# Altium PCB 主板-双BH(1).PcbDoc (part 2 of 13)
Units mm, origin at the board's own origin, x right, y up, seen from the top; angles counter-clockwise.
Board outline 97.69 x 103.45 mm, 2 copper layers (Top Layer, Bottom Layer); 78 components, 75 nets, 243 pads, 279 vias.
Unrouted connection lines stored in the file: 7.
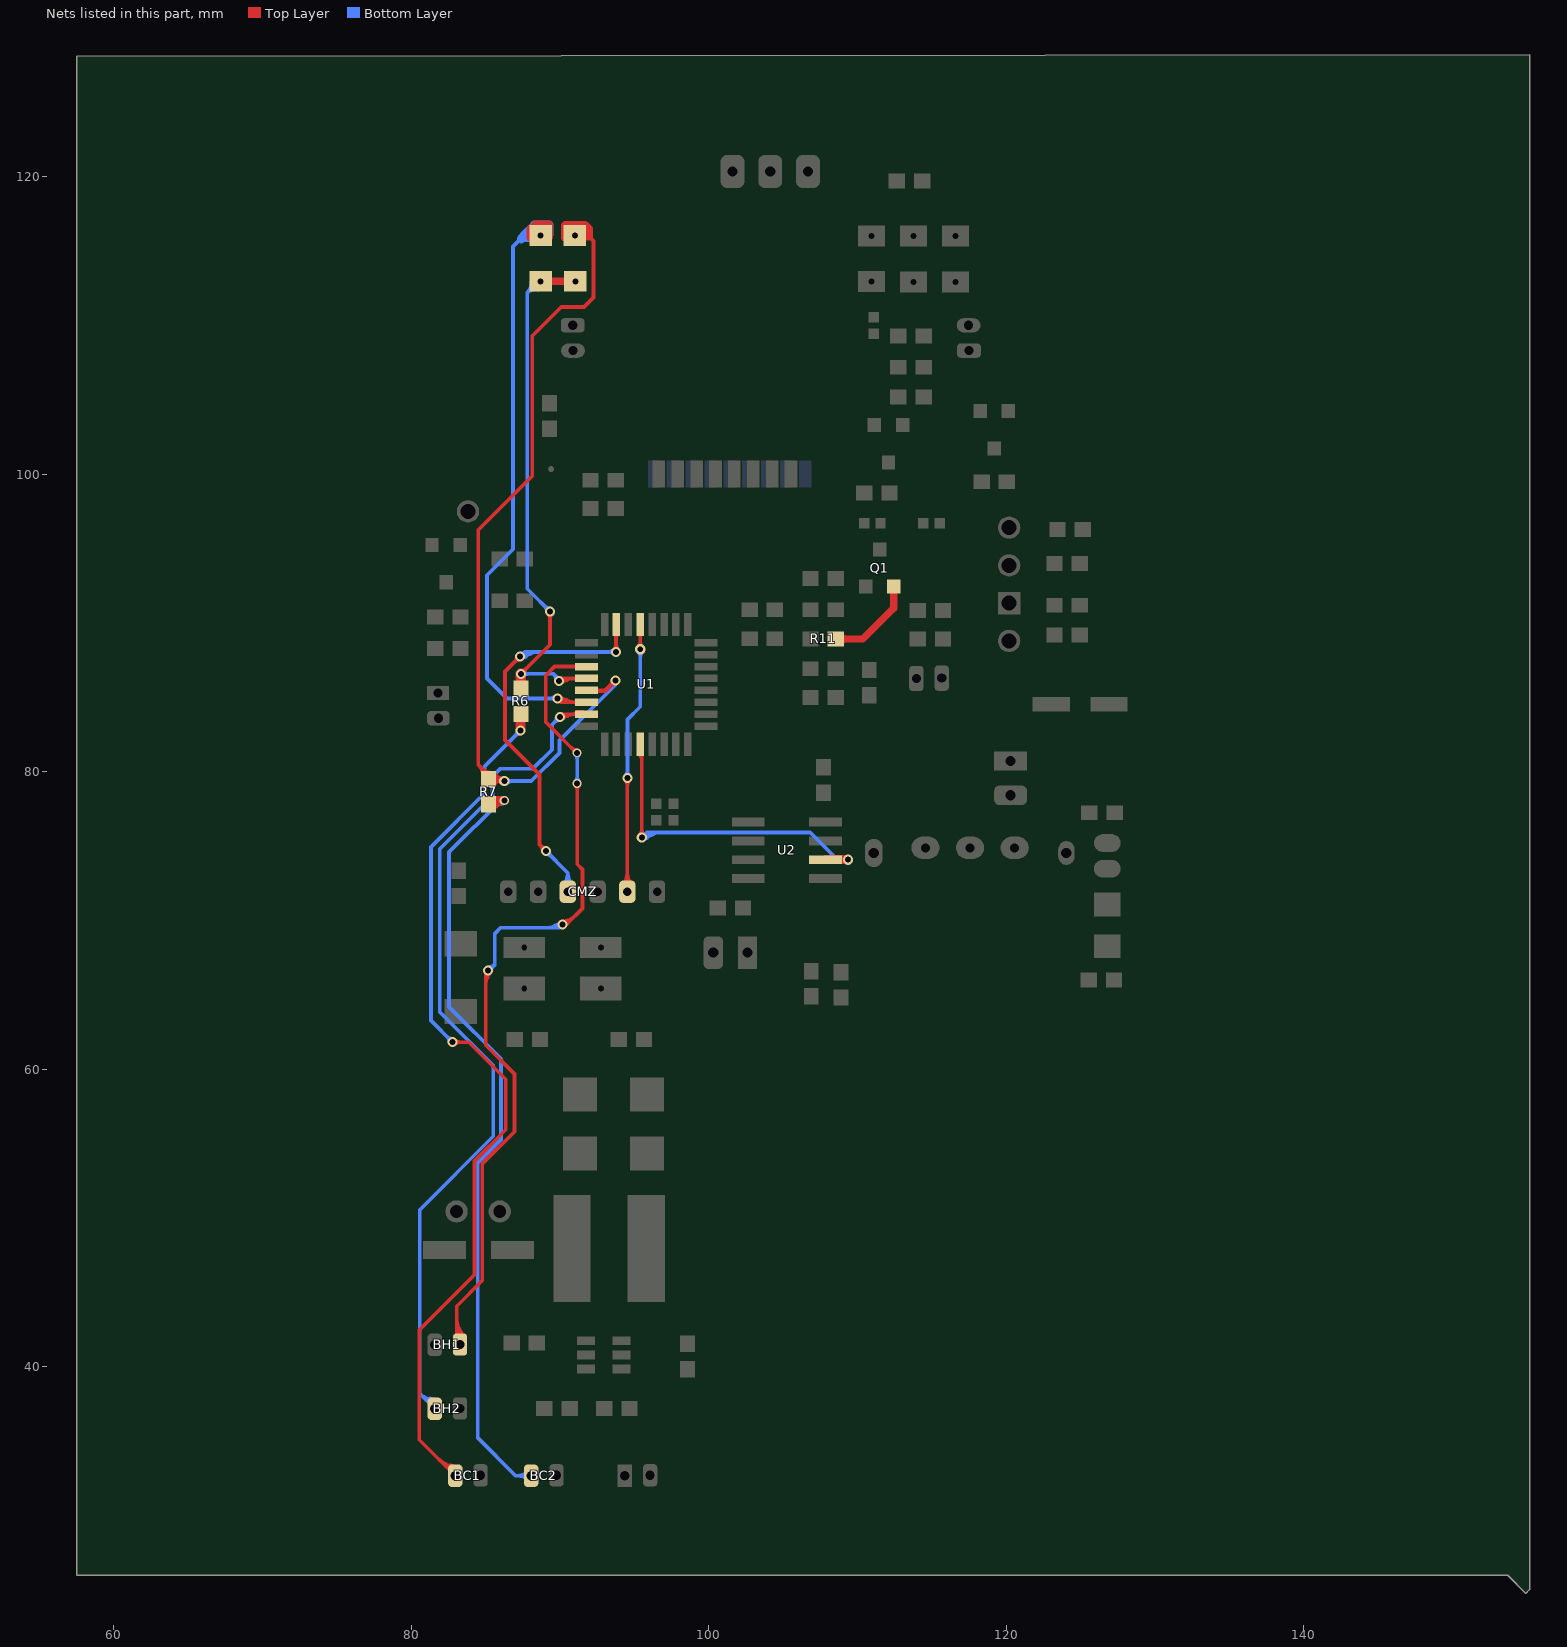
[diagram p2: the nets of this part, all layers, seen from the top]

## Via types
v1: diameter 0.7, hole 0.4, Top Layer to Bottom Layer, 108 vias
v2: diameter 0.68, hole 0.4, Top Layer to Bottom Layer, 87 vias
v3: diameter 0.8, hole 0.5, Top Layer to Bottom Layer, tented both sides, 33 vias
v4: diameter 0.6, hole 0.4, Top Layer to Bottom Layer, 12 vias
v5: diameter 0.9, hole 0.5, Top Layer to Bottom Layer, 8 vias
v6: diameter 0.8, hole 0.5, Top Layer to Bottom Layer, 6 vias
v7: diameter 1, hole 0.75, Top Layer to Bottom Layer, tented both sides, 5 vias
v8: diameter 3.4, hole 2.9, Top Layer to Bottom Layer, 4 vias
v9: diameter 1, hole 0.6, Top Layer to Bottom Layer, tented both sides, 3 vias
v10: diameter 1, hole 0.56, Top Layer to Bottom Layer, tented both sides, 2 vias
v11: diameter 1.1, hole 0.68, Top Layer to Bottom Layer, 2 vias
v12: diameter 0.8, hole 0.4, Top Layer to Bottom Layer, 2 vias
v13: diameter 0.65, hole 0.4, Top Layer to Bottom Layer, tented both sides, 2 vias
v14: diameter 1, hole 0.6, Top Layer to Bottom Layer, tented bottom, 1 vias
v15: diameter 0.7, hole 0.4, Top Layer to Bottom Layer, tented bottom, 1 vias
v16: diameter 0.95, hole 0.5, Top Layer to Bottom Layer, 1 vias
v17: diameter 0.64, hole 0.4, Top Layer to Bottom Layer, 1 vias
v18: diameter 0.62, hole 0.4, Top Layer to Bottom Layer, 1 vias

## Nets (pads, with @x,y where several pads share a name; then routed paths per layer and width w, separated by ;. In a path a pad name is that pad's centre, name@x,y a point inside that pad or via, vN(x,y) a via of type N, cw(c..) or ccw(c..) an arc to the next point about the centre after c; other vN are vias at no path point) (continued)
38BC1: BC1.2 pad.0@88.7,112.98 pad.0@91.032,112.98 R6.1 R6.2 U1.20 | length 138.1
  Top Layer w0.254: BC1.2@82.613,32.984 ccw(c82.112,33.04) 82.503,33.359 ccw(c82.727,33.541) BC1.2@82.834,33.272 ; v2(82.779,61.824) 83.871,61.824 86.36,59.334 86.36,55.939 84.261,53.84 84.261,46.186 80.543,42.469 80.543,35.095 BC1.2@82.964,32.674 ; R6.2@87.351,83.605 R6.2@87.63,83.884 ; R6.1@87.376,85.658 R6.1@87.45,85.584 ; v2(87.376,86.589) 89.332,88.544 v2(89.332,90.78) ; v2(89.941,86.106) 90.113,86.278 U1.20@91.775,86.278 ; 81.9,33.738 ccw(c82.964,34.801) BC1.2@82.964,33.297 ; 81.9,33.738 ccw(c82.964,34.801) BC1.2@82.964,33.297 ; 81.9,33.738 ccw(c82.964,34.801) BC1.2@82.964,33.297 ; 82.158,33.513 cw(c81.874,32.455) BC1.2@82.874,32.904 ; 82.158,33.513 cw(c81.874,32.455) BC1.2@82.874,32.904 ; 82.158,33.513 cw(c81.874,32.455) BC1.2@82.874,32.904 ; 82.334,33.304 ccw(c82.964,33.934) BC1.2@82.964,33.043 ; 82.334,33.304 ccw(c82.964,33.934) BC1.2@82.964,33.043 ; 82.334,33.304 ccw(c82.964,33.934) BC1.2@82.964,33.043 ; BC1.2@82.674,33.375 cw(c82.503,32.738) BC1.2@83.105,33.008 ; BC1.2@82.674,33.375 cw(c82.503,32.738) BC1.2@83.105,33.008 ; BC1.2@82.674,33.375 cw(c82.503,32.738) BC1.2@83.105,33.008 ; v2@82.929,61.673 cw(c83.293,61.309) 83.293,61.824 ; v2@82.929,61.673 cw(c83.293,61.309) 83.293,61.824 ; v2@82.929,61.673 cw(c83.293,61.309) 83.293,61.824 ; v2@82.929,61.974 ccw(c83.293,62.338) 83.293,61.824 ; v2@82.929,61.974 ccw(c83.293,62.338) 83.293,61.824 ; v2@82.929,61.974 ccw(c83.293,62.338) 83.293,61.824 ; v2@87.376,86.802 ccw(c87.376,87.316) 87.74,86.952 ; v2@87.376,86.802 ccw(c87.376,87.316) 87.74,86.952 ; v2@87.376,86.802 ccw(c87.376,87.316) 87.74,86.952 ; v2@87.589,86.589 cw(c88.103,86.589) 87.74,86.952 ; v2@87.589,86.589 cw(c88.103,86.589) 87.74,86.952 ; v2@87.589,86.589 cw(c88.103,86.589) 87.74,86.952 ; v2@89.181,90.629 cw(c88.818,90.265) 89.332,90.265 ; v2@89.181,90.629 cw(c88.818,90.265) 89.332,90.265 ; v2@89.181,90.629 cw(c88.818,90.265) 89.332,90.265 ; 89.332,90.265 cw(c89.846,90.265) v2@89.482,90.629 ; 89.332,90.265 cw(c89.846,90.265) v2@89.482,90.629 ; 89.332,90.265 cw(c89.846,90.265) v2@89.482,90.629 ; v2@89.912,86.135 cw(c90.256,85.791) 90.256,86.278 ; v2@89.912,86.135 cw(c90.256,85.791) 90.256,86.278 ; v2@89.912,86.135 cw(c90.256,85.791) 90.256,86.278 ; v2@90.092,85.955 cw(c90.87,85.178) 90.87,86.278 ; v2@90.092,85.955 cw(c90.87,85.178) 90.87,86.278 ; v2@90.092,85.955 cw(c90.87,85.178) 90.87,86.278 ; v2@90.103,86.245 ccw(c90.331,86.442) 90.482,86.181 ; v2@90.103,86.245 ccw(c90.331,86.442) 90.482,86.181 ; v2@90.103,86.245 ccw(c90.331,86.442) 90.482,86.181 ; 90.953,86.278 ccw(c90.953,86.574) U1.20@91.163,86.364 ; 90.953,86.278 cw(c90.953,85.981) U1.20@91.163,86.191 ; 90.953,86.278 ccw(c90.953,86.574) U1.20@91.163,86.364 ; 90.953,86.278 cw(c90.953,85.981) U1.20@91.163,86.191 ; 90.953,86.278 ccw(c90.953,86.574) U1.20@91.163,86.364 ; 90.953,86.278 cw(c90.953,85.981) U1.20@91.163,86.191
  Top Layer w0.5: pad.0@88.7,112.98 pad.0@91.032,112.98
  Top Layer w0.7: v2(87.351,82.779) 87.351,83.605 87.351,83.785 R6.2@87.45,83.884 ; R6.1@87.376,85.658 v2(87.376,86.589)
  Bottom Layer w0.254: v2(82.779,61.824) 81.331,63.271 81.331,74.955 84.938,78.562 84.938,80.366 v2(87.351,82.779) ; v2(87.376,86.589) 89.56,86.589 ; pad.0@88.57,112.98 87.808,112.218 ; v2@89.497,90.614 87.808,92.304 87.808,112.218 ; v2@90.043,86.106 89.56,86.589 ; 82.415,62.187 ccw(c82.779,62.551) v2@82.779,62.037 ; 82.415,62.187 cw(c82.051,61.824) v2@82.566,61.824 ; 82.415,62.187 ccw(c82.779,62.551) v2@82.779,62.037 ; 82.415,62.187 cw(c82.051,61.824) v2@82.566,61.824 ; 82.415,62.187 ccw(c82.779,62.551) v2@82.779,62.037 ; 82.415,62.187 cw(c82.051,61.824) v2@82.566,61.824 ; 86.987,82.415 ccw(c86.623,82.779) v2@87.138,82.779 ; 86.987,82.415 cw(c87.351,82.051) v2@87.351,82.566 ; 86.987,82.415 ccw(c86.623,82.779) v2@87.138,82.779 ; 86.987,82.415 cw(c87.351,82.051) v2@87.351,82.566 ; 86.987,82.415 ccw(c86.623,82.779) v2@87.138,82.779 ; 86.987,82.415 cw(c87.351,82.051) v2@87.351,82.566 ; v2@87.527,86.438 cw(c87.89,86.074) 87.89,86.589 ; v2@87.527,86.438 cw(c87.89,86.074) 87.89,86.589 ; v2@87.527,86.438 cw(c87.89,86.074) 87.89,86.589 ; v2@87.527,86.739 ccw(c87.89,87.103) 87.89,86.589 ; v2@87.527,86.739 ccw(c87.89,87.103) 87.89,86.589 ; v2@87.527,86.739 ccw(c87.89,87.103) 87.89,86.589 ; 87.808,112.218 ccw(c87.149,112.876) pad.0@88.078,112.941 ; 87.808,112.218 cw(c88.348,111.678) pad.0@88.52,112.422 ; 87.808,112.218 ccw(c87.149,112.876) pad.0@88.078,112.941 ; 87.808,112.218 cw(c88.348,111.678) pad.0@88.52,112.422 ; 87.808,112.218 ccw(c87.149,112.876) pad.0@88.078,112.941 ; 87.808,112.218 cw(c88.348,111.678) pad.0@88.52,112.422 ; 88.968,91.143 ccw(c89.332,91.507) v2@89.332,90.993 ; 88.968,91.143 cw(c88.605,90.78) v2@89.119,90.78 ; 88.968,91.143 ccw(c89.332,91.507) v2@89.332,90.993 ; 88.968,91.143 cw(c88.605,90.78) v2@89.119,90.78 ; 88.968,91.143 ccw(c89.332,91.507) v2@89.332,90.993 ; 88.968,91.143 cw(c88.605,90.78) v2@89.119,90.78 ; 89.56,86.589 cw(c89.148,86.176) v2@89.729,86.125 ; 89.56,86.589 cw(c89.148,86.176) v2@89.729,86.125 ; 89.56,86.589 cw(c89.148,86.176) v2@89.729,86.125 ; 89.751,86.398 ccw(c89.941,86.588) v2@89.941,86.319 ; 89.751,86.398 ccw(c89.941,86.588) v2@89.941,86.319 ; 89.751,86.398 ccw(c89.941,86.588) v2@89.941,86.319
38BC2: BC2.2 pad.0@91,116.053 R7.1 R7.2 U1.21 | length 150.7
  Top Layer w0.254: R7.2@84.828,79.597 ccw(c83.702,79.697) 84.502,80.497 ; 84.886,80.112 cw(c84.408,79.634) R7.2@85.081,79.574 ; R7.2@84.948,79.837 ccw(c85.497,79.984) R7.2@85.363,79.433 ; R7.2@84.964,80.035 ccw(c85.2,80.271) R7.2@85.2,79.937 ; R7.2@85.382,79.616 84.502,80.497 ; R7.1@85.395,77.814 R7.1@85.661,78.08 ; R7.2@85.395,79.514 R7.2@85.408,79.527 ; R7.2@85.464,79.25 cw(c86.133,78.58) v2@86.133,79.527 ; R7.2@85.464,79.778 ccw(c86.068,80.381) v2@86.068,79.527 ; R7.2@85.559,79.664 cw(c85.339,78.844) v2@86.074,79.269 ; v2@86.436,79.527 R7.2@85.408,79.527 ; U1.21@91.775,85.478 U1.21@91.807,85.446 ; 91.923,116.027 92.256,115.694 92.256,111.89 91.618,111.252 90.094,111.252 88.138,109.296 88.138,99.898 84.502,96.262 84.502,80.497 ; R7.2@85.408,79.527 cw(c85.408,78.569) v2@86.104,79.228 ; R7.2@85.408,79.527 cw(c85.408,78.569) v2@86.104,79.228 ; R7.2@85.408,79.527 cw(c85.408,78.569) v2@86.104,79.228 ; 85.77,79.433 ccw(c85.893,79.633) v2@86.084,79.498 ; 85.77,79.433 ccw(c85.893,79.633) v2@86.084,79.498 ; 85.77,79.433 ccw(c85.893,79.633) v2@86.084,79.498 ; 84.73,80.269 cw(c84.025,79.564) 85.022,79.564 ccw(c84.025,79.564) 84.73,80.269 ; 84.826,80.172 ccw(c85.395,80.741) 85.395,79.937 cw(c85.395,80.741) 84.826,80.172 ; R7.2@85.659,79.25 cw(c86.328,78.58) 86.328,79.527 ccw(c86.328,78.58) R7.2@85.659,79.25 ; R7.2@85.659,79.778 ccw(c86.262,80.381) 86.262,79.527 cw(c86.262,80.381) R7.2@85.659,79.778
  Top Layer w0.3: U1.21@91.807,85.446 93.04,85.446 v2(93.726,86.131) ; U1.21@92.371,85.548 ccw(c92.619,85.796) 92.619,85.446 ; U1.21@92.371,85.548 ccw(c92.619,85.796) 92.619,85.446 ; U1.21@92.371,85.548 ccw(c92.619,85.796) 92.619,85.446 ; 93.402,85.807 ccw(c93.077,86.131) v2@93.536,86.131 ; 93.402,85.807 cw(c93.726,85.483) v2@93.726,85.941 ; 93.402,85.807 ccw(c93.077,86.131) v2@93.536,86.131 ; 93.402,85.807 cw(c93.726,85.483) v2@93.726,85.941 ; 93.402,85.807 ccw(c93.077,86.131) v2@93.536,86.131 ; 93.402,85.807 cw(c93.726,85.483) v2@93.726,85.941
  Top Layer w0.56: R7.1@85.356,77.708 cw(c86.252,76.812) v18@86.252,78.08 ; R7.1@85.661,78.08 v18(86.258,78.08) ; v18(86.258,78.08) ccw(c86.258,77.226) 85.572,77.733 cw(c86.258,77.226) v18(86.258,78.08) ; R7.1@85.367,78.007 ccw(c85.636,78.238) 85.858,77.961 cw(c85.636,78.238) R7.1@85.367,78.007
  Top Layer w0.6: pad.0@90.373,115.937 91.121,115.937 91.211,116.027 91.923,116.027 91.923,116.484 91.669,116.738 90.373,116.738 pad.0@90.373,115.937
  Bottom Layer w0.254: v18(86.258,78.08) 86.03,78.08 82.55,74.6 82.55,64.186 86.03,60.706 86.03,55.289 84.48,53.739 84.48,35.204 87.011,32.674 BC2.2@87.964,32.674 ; v2@86.258,79.527 86.411,79.375 88.073,79.375 89.972,81.273 89.972,82.098 93.726,85.852 v2(93.726,86.131) ; 85.556,77.606 cw(c86.258,76.903) v18@86.258,77.897 ; 85.556,77.606 cw(c86.258,76.903) v18@86.258,77.897 ; 85.556,77.606 cw(c86.258,76.903) v18@86.258,77.897 ; 86.058,77.843 ccw(c85.946,78.26) v18@86.32,78.044 ; 86.058,77.843 ccw(c85.946,78.26) v18@86.32,78.044 ; 86.058,77.843 ccw(c85.946,78.26) v18@86.32,78.044 ; v2@86.409,79.224 cw(c86.773,78.861) 86.773,79.375 ; v2@86.409,79.224 cw(c86.773,78.861) 86.773,79.375 ; v2@86.409,79.224 cw(c86.773,78.861) 86.773,79.375 ; v2@86.409,79.526 ccw(c86.773,79.889) 86.773,79.375 ; v2@86.409,79.526 ccw(c86.773,79.889) 86.773,79.375 ; v2@86.409,79.526 ccw(c86.773,79.889) 86.773,79.375 ; 87.212,32.674 ccw(c87.212,33.526) BC2.2@87.814,32.924 ; 87.212,32.674 cw(c87.212,31.822) BC2.2@87.814,32.425 ; 87.212,32.674 ccw(c87.212,33.526) BC2.2@87.814,32.924 ; 87.212,32.674 cw(c87.212,31.822) BC2.2@87.814,32.425 ; 87.212,32.674 ccw(c87.212,33.526) BC2.2@87.814,32.924 ; 87.212,32.674 cw(c87.212,31.822) BC2.2@87.814,32.425 ; 93.165,85.291 ccw(c92.324,86.131) v2@93.513,86.131 ; 93.165,85.291 ccw(c92.324,86.131) v2@93.513,86.131 ; 93.165,85.291 ccw(c92.324,86.131) v2@93.513,86.131 ; 93.424,85.8 cw(c94.007,85.644) v2@93.706,86.167 ; 93.424,85.8 cw(c94.007,85.644) v2@93.706,86.167 ; 93.424,85.8 cw(c94.007,85.644) v2@93.706,86.167 ; 93.598,85.724 ccw(c93.191,86.131) v2@93.767,86.131 ; 93.598,85.724 ccw(c93.191,86.131) v2@93.767,86.131 ; 93.598,85.724 ccw(c93.191,86.131) v2@93.767,86.131
  Bottom Layer w0.6: pad.0@90.765,115.937 90.5,115.937 90.5,116.713 91.161,116.713 91.542,116.332 91.542,116.027 pad.0@90.958,116.027
  other v2: 86.258,79.375
38OUT-1: pad.0@88.7,116.053 U1.22 | length 63.3
  Top Layer w0.254: v2(89.84,84.938) 90.1,84.678 ; U1.22@91.775,84.678 90.1,84.678 ; v2@89.811,84.909 ccw(c90.369,85.467) 90.369,84.678 ; v2@89.811,84.909 ccw(c90.369,85.467) 90.369,84.678 ; v2@89.811,84.909 ccw(c90.369,85.467) 90.369,84.678 ; v2@89.895,84.732 cw(c89.993,84.366) 90.183,84.694 ; v2@89.895,84.732 cw(c89.993,84.366) 90.183,84.694 ; v2@89.895,84.732 cw(c89.993,84.366) 90.183,84.694 ; v2@89.895,84.732 cw(c89.951,84.528) 90.1,84.678 ; v2@89.895,84.732 cw(c89.951,84.528) 90.1,84.678 ; v2@89.895,84.732 cw(c89.951,84.528) 90.1,84.678 ; v2@89.961,84.762 cw(c90.256,84.334) 90.516,84.785 ; v2@89.961,84.762 cw(c90.256,84.334) 90.516,84.785 ; v2@89.961,84.762 cw(c90.256,84.334) 90.516,84.785 ; v2@89.99,85.088 ccw(c90.982,86.08) 90.982,84.678 ; v2@89.99,85.088 ccw(c90.982,86.08) 90.982,84.678 ; v2@89.99,85.088 ccw(c90.982,86.08) 90.982,84.678 ; v2@90.045,84.882 ccw(c90.249,84.827) 90.1,84.678 ; v2@90.045,84.882 ccw(c90.249,84.827) 90.1,84.678 ; v2@90.045,84.882 ccw(c90.249,84.827) 90.1,84.678 ; v2@90.053,84.93 ccw(c90.316,84.921) 90.184,84.693 ; v2@90.053,84.93 ccw(c90.316,84.921) 90.184,84.693 ; v2@90.053,84.93 ccw(c90.316,84.921) 90.184,84.693 ; 90.953,84.678 ccw(c90.953,84.974) U1.22@91.163,84.764 ; 90.953,84.678 cw(c90.953,84.381) U1.22@91.163,84.591 ; 90.953,84.678 ccw(c90.953,84.974) U1.22@91.163,84.764 ; 90.953,84.678 cw(c90.953,84.381) U1.22@91.163,84.591 ; 90.953,84.678 ccw(c90.953,84.974) U1.22@91.163,84.764 ; 90.953,84.678 cw(c90.953,84.381) U1.22@91.163,84.591
  Top Layer w0.6: pad.0@88.065,115.938 88.065,116.462 88.367,116.764 89.23,116.764 pad.0@89.23,115.951
  Bottom Layer w0.254: pad.0@88.8,116.053 87.58,116.053 86.843,115.316 86.843,94.971 85.09,93.218 85.09,86.284 86.436,84.938 v2(89.84,84.938) ; 89.326,84.938 ccw(c89.326,85.452) v2@89.689,85.088 ; 89.326,84.938 cw(c89.326,84.423) v2@89.689,84.787 ; 89.326,84.938 ccw(c89.326,85.452) v2@89.689,85.088 ; 89.326,84.938 cw(c89.326,84.423) v2@89.689,84.787 ; 89.326,84.938 ccw(c89.326,85.452) v2@89.689,85.088 ; 89.326,84.938 cw(c89.326,84.423) v2@89.689,84.787
  Bottom Layer w0.6: 87.398,115.828 87.507,115.937 ; 87.58,116.053 88.29,116.764 89.256,116.764 89.256,116.14 88.887,116.14 88.8,116.053 88.683,115.937 87.507,115.937 ; 87.507,115.937 ccw(c87.507,117.06) pad.0@88.35,116.318 ; 87.507,115.937 ccw(c87.507,117.06) pad.0@88.35,116.318 ; 87.507,115.937 ccw(c87.507,117.06) pad.0@88.35,116.318
38OUT-2: 
84-D: 
84ADC: Q1.2 R11.1 | length 11.3
  Top Layer w0.5: R11.1@108.55,88.932 110.369,88.932 112.45,91.012 Q1.2@112.45,92.45 ; R11.1@108.777,88.755 cw(c109.204,88.328) 109.204,88.932 ; R11.1@108.777,88.755 cw(c109.204,88.328) 109.204,88.932 ; R11.1@108.777,88.755 cw(c109.204,88.328) 109.204,88.932 ; R11.1@108.777,89.109 ccw(c109.204,89.535) 109.204,88.932 ; R11.1@108.777,89.109 ccw(c109.204,89.535) 109.204,88.932 ; R11.1@108.777,89.109 ccw(c109.204,89.535) 109.204,88.932 ; Q1.2@112.309,92.284 cw(c111.967,91.942) 112.45,91.942 ; Q1.2@112.309,92.284 cw(c111.967,91.942) 112.45,91.942 ; Q1.2@112.309,92.284 cw(c111.967,91.942) 112.45,91.942 ; 112.45,91.942 cw(c112.933,91.942) Q1.2@112.591,92.284 ; 112.45,91.942 cw(c112.933,91.942) Q1.2@112.591,92.284 ; 112.45,91.942 cw(c112.933,91.942) Q1.2@112.591,92.284
<Z: CMZ.3 U1.13 | length 34.5
  Top Layer w0.254: CMZ.3@94.53,71.944 94.53,79.569 v2(94.539,79.578) ; U1.13@95.4,89.902 v2(95.4,88.242) v2@95.58,88.062 ; CMZ.3@94.231,72.443 ccw(c93.509,73.165) 94.53,73.165 ; CMZ.3@94.231,72.443 ccw(c93.509,73.165) 94.53,73.165 ; CMZ.3@94.231,72.443 ccw(c93.509,73.165) 94.53,73.165 ; v2@94.388,79.428 cw(c94.046,79.085) 94.53,79.085 ; v2@94.388,79.428 cw(c94.046,79.085) 94.53,79.085 ; v2@94.388,79.428 cw(c94.046,79.085) 94.53,79.085 ; 94.53,73.165 ccw(c95.551,73.165) CMZ.3@94.829,72.443 ; 94.53,73.165 ccw(c95.551,73.165) CMZ.3@94.829,72.443 ; 94.53,73.165 ccw(c95.551,73.165) CMZ.3@94.829,72.443 ; 94.53,79.043 cw(c95.074,79.043) v2@94.689,79.428 ; 94.53,79.043 cw(c95.074,79.043) v2@94.689,79.428 ; 94.53,79.043 cw(c95.074,79.043) v2@94.689,79.428 ; v2@95.249,88.393 ccw(c94.886,88.756) 95.4,88.756 ; v2@95.249,88.393 ccw(c94.886,88.756) 95.4,88.756 ; v2@95.249,88.393 ccw(c94.886,88.756) 95.4,88.756 ; U1.13@95.313,89.29 cw(c95.103,89.08) 95.4,89.08 ; U1.13@95.313,89.29 cw(c95.103,89.08) 95.4,89.08 ; U1.13@95.313,89.29 cw(c95.103,89.08) 95.4,89.08 ; 95.4,88.756 ccw(c95.914,88.756) v2@95.551,88.393 ; 95.4,88.756 ccw(c95.914,88.756) v2@95.551,88.393 ; 95.4,88.756 ccw(c95.914,88.756) v2@95.551,88.393 ; 95.4,89.08 cw(c95.697,89.08) U1.13@95.487,89.29 ; 95.4,89.08 cw(c95.697,89.08) U1.13@95.487,89.29 ; 95.4,89.08 cw(c95.697,89.08) U1.13@95.487,89.29
  Bottom Layer w0.254: v2(94.539,79.578) 94.539,83.515 95.402,84.379 v2@95.402,88.242 ; v2@94.388,79.729 ccw(c94.025,80.092) 94.539,80.092 ; v2@94.388,79.729 ccw(c94.025,80.092) 94.539,80.092 ; v2@94.388,79.729 ccw(c94.025,80.092) 94.539,80.092 ; 94.539,80.092 ccw(c95.053,80.092) v2@94.689,79.729 ; 94.539,80.092 ccw(c95.053,80.092) v2@94.689,79.729 ; 94.539,80.092 ccw(c95.053,80.092) v2@94.689,79.729 ; v2@95.249,88.091 cw(c94.88,87.722) 95.402,87.722 ; v2@95.249,88.091 cw(c94.88,87.722) 95.402,87.722 ; v2@95.249,88.091 cw(c94.88,87.722) 95.402,87.722 ; 95.402,87.734 cw(c95.908,87.734) v2@95.551,88.091 ; 95.402,87.734 cw(c95.908,87.734) v2@95.551,88.091 ; 95.402,87.734 cw(c95.908,87.734) v2@95.551,88.091
AM: CMZ.5 U1.15 | length 55.3
  Top Layer w0.254: v2(87.325,87.757) 86.309,86.741 86.309,82.144 88.624,79.829 88.624,75.105 v2(89.052,74.676) ; v2(93.777,88.062) U1.15@93.777,89.902 ; 86.962,87.393 ccw(c86.598,87.757) v2@87.112,87.757 ; 86.962,87.393 cw(c87.325,87.03) v2@87.325,87.544 ; 86.962,87.393 ccw(c86.598,87.757) v2@87.112,87.757 ; 86.962,87.393 cw(c87.325,87.03) v2@87.325,87.544 ; 86.962,87.393 ccw(c86.598,87.757) v2@87.112,87.757 ; 86.962,87.393 cw(c87.325,87.03) v2@87.325,87.544 ; 88.689,75.04 ccw(c89.052,75.403) v2@89.052,74.889 ; 88.689,75.04 cw(c88.325,74.676) v2@88.839,74.676 ; 88.689,75.04 ccw(c89.052,75.403) v2@89.052,74.889 ; 88.689,75.04 cw(c88.325,74.676) v2@88.839,74.676 ; 88.689,75.04 ccw(c89.052,75.403) v2@89.052,74.889 ; 88.689,75.04 cw(c88.325,74.676) v2@88.839,74.676 ; v2@93.626,88.212 ccw(c93.263,88.576) 93.777,88.576 ; v2@93.626,88.212 ccw(c93.263,88.576) 93.777,88.576 ; v2@93.626,88.212 ccw(c93.263,88.576) 93.777,88.576 ; 93.777,88.576 ccw(c94.291,88.576) v2@93.927,88.212 ; 93.777,88.576 ccw(c94.291,88.576) v2@93.927,88.212 ; 93.777,88.576 ccw(c94.291,88.576) v2@93.927,88.212 ; 93.777,89.024 cw(c94.153,89.024) U1.15@93.887,89.29 ; 93.777,89.024 cw(c94.153,89.024) U1.15@93.887,89.29 ; 93.777,89.024 cw(c94.153,89.024) U1.15@93.887,89.29
  Bottom Layer w0.254: v2(87.325,87.757) 87.63,88.062 v2(93.777,88.062) ; v2(89.052,74.676) 90.53,73.198 CMZ.5@90.53,71.944 ; v2@87.296,87.786 cw(c87.962,87.12) 87.962,88.062 ; v2@87.296,87.786 cw(c87.962,87.12) 87.962,88.062 ; v2@87.296,87.786 cw(c87.962,87.12) 87.962,88.062 ; v2@87.305,87.721 ccw(c87.49,88.055) 87.681,87.725 ; v2@87.305,87.721 ccw(c87.49,88.055) 87.681,87.725 ; v2@87.305,87.721 ccw(c87.49,88.055) 87.681,87.725 ; v2@87.38,87.963 ccw(c87.478,88.329) 87.668,88.001 ; v2@87.38,87.963 ccw(c87.478,88.329) 87.668,88.001 ; v2@87.38,87.963 ccw(c87.478,88.329) 87.668,88.001 ; v2@87.428,87.943 ccw(c87.744,88.514) 88.07,87.949 ; v2@87.428,87.943 ccw(c87.744,88.514) 88.07,87.949 ; v2@87.428,87.943 ccw(c87.744,88.514) 88.07,87.949 ; v2@87.476,87.606 cw(c88.575,86.507) 88.575,88.062 ; v2@87.476,87.606 cw(c88.575,86.507) 88.575,88.062 ; v2@87.476,87.606 cw(c88.575,86.507) 88.575,88.062 ; v2@87.537,87.733 cw(c87.942,87.688) 87.738,88.041 ; v2@87.537,87.733 cw(c87.942,87.688) 87.738,88.041 ; v2@87.537,87.733 cw(c87.942,87.688) 87.738,88.041 ; v2@89.052,74.463 cw(c89.052,73.949) 89.416,74.312 ; v2@89.052,74.463 cw(c89.052,73.949) 89.416,74.312 ; v2@89.052,74.463 cw(c89.052,73.949) 89.416,74.312 ; v2@89.265,74.676 ccw(c89.78,74.676) 89.416,74.312 ; v2@89.265,74.676 ccw(c89.78,74.676) 89.416,74.312 ; v2@89.265,74.676 ccw(c89.78,74.676) 89.416,74.312 ; CMZ.5@90.231,72.443 ccw(c89.509,73.165) 90.53,73.165 ; CMZ.5@90.231,72.443 ccw(c89.509,73.165) 90.53,73.165 ; CMZ.5@90.231,72.443 ccw(c89.509,73.165) 90.53,73.165 ; 90.53,73.165 ccw(c91.551,73.165) CMZ.5@90.829,72.443 ; 90.53,73.165 ccw(c91.551,73.165) CMZ.5@90.829,72.443 ; 90.53,73.165 ccw(c91.551,73.165) CMZ.5@90.829,72.443 ; 93.263,88.062 ccw(c93.263,88.576) v2@93.626,88.212 ; 93.263,88.062 cw(c93.263,87.548) v2@93.626,87.911 ; 93.263,88.062 ccw(c93.263,88.576) v2@93.626,88.212 ; 93.263,88.062 cw(c93.263,87.548) v2@93.626,87.911 ; 93.263,88.062 ccw(c93.263,88.576) v2@93.626,88.212 ; 93.263,88.062 cw(c93.263,87.548) v2@93.626,87.911
AM-D: 
BH1: BH1.1 U1.19 | length 94
  Top Layer w0.254: BH1.1@83.058,41.275 83.058,44.069 84.769,45.78 84.769,53.63 86.944,55.805 86.944,59.69 85.014,61.62 85.014,66.446 v2@85.166,66.599 ; v2(90.17,69.723) 90.424,69.723 91.516,70.815 91.516,73.431 91.161,73.787 v4(91.161,79.223) ; v4@91.135,81.255 89.052,83.337 89.052,86.487 89.643,87.077 U1.19@91.775,87.077 ; 83.058,42.553 ccw(c84.067,42.553) BH1.1@83.354,41.84 ; 83.058,42.553 ccw(c84.067,42.553) BH1.1@83.354,41.84 ; 83.058,42.553 ccw(c84.067,42.553) BH1.1@83.354,41.84 ; 83.058,43.167 ccw(c84.681,43.167) BH1.1@83.534,42.02 ; 83.058,43.167 ccw(c84.681,43.167) BH1.1@83.534,42.02 ; 83.058,43.167 ccw(c84.681,43.167) BH1.1@83.534,42.02 ; BH1.1@83.08,42.058 ccw(c82.998,42.174) BH1.1@83.12,42.245 ; BH1.1@83.08,42.058 ccw(c82.998,42.174) BH1.1@83.12,42.245 ; BH1.1@83.08,42.058 ccw(c82.998,42.174) BH1.1@83.12,42.245 ; BH1.1@83.091,42.065 ccw(c82.881,42.385) 83.212,42.576 ; BH1.1@83.091,42.065 ccw(c82.881,42.385) 83.212,42.576 ; BH1.1@83.091,42.065 ccw(c82.881,42.385) 83.212,42.576 ; BH1.1@83.12,42.245 ccw(c83.335,42.368) BH1.1@83.314,42.122 ; BH1.1@83.12,42.245 ccw(c83.335,42.368) BH1.1@83.314,42.122 ; BH1.1@83.12,42.245 ccw(c83.335,42.368) BH1.1@83.314,42.122 ; BH1.1@83.23,41.853 ccw(c83.029,42.16) 83.347,42.344 ; BH1.1@83.23,41.853 ccw(c83.029,42.16) 83.347,42.344 ; BH1.1@83.23,41.853 ccw(c83.029,42.16) 83.347,42.344 ; 85.014,65.767 cw(c86.048,65.767) v2@85.317,66.499 ; 85.014,65.767 cw(c86.048,65.767) v2@85.317,66.499 ; 85.014,65.767 cw(c86.048,65.767) v2@85.317,66.499 ; v2@85.039,66.479 cw(c84.881,66.269) 85.108,66.138 ; v2@85.039,66.479 cw(c84.881,66.269) 85.108,66.138 ; v2@85.039,66.479 cw(c84.881,66.269) 85.108,66.138 ; v2@90.134,69.743 cw(c90.647,69.455) 90.495,70.023 ; v2@90.134,69.743 cw(c90.647,69.455) 90.495,70.023 ; v2@90.134,69.743 cw(c90.647,69.455) 90.495,70.023 ; v2@90.17,69.682 ccw(c90.17,70.196) 90.534,69.833 ; v2@90.17,69.682 ccw(c90.17,70.196) 90.534,69.833 ; v2@90.17,69.682 ccw(c90.17,70.196) 90.534,69.833 ; v2@90.17,69.936 ccw(c90.17,71.063) 90.967,70.266 ; v2@90.17,69.936 ccw(c90.17,71.063) 90.967,70.266 ; v2@90.17,69.936 ccw(c90.17,71.063) 90.967,70.266 ; 90.779,81.611 ccw(c91.161,81.993) v4@91.161,81.453 ; 90.779,81.611 ccw(c91.161,81.993) v4@91.161,81.453 ; 90.779,81.611 ccw(c91.161,81.993) v4@91.161,81.453 ; 90.901,81.489 cw(c90.693,81.28) v4@90.988,81.28 ; 90.901,81.489 cw(c90.693,81.28) v4@90.988,81.28 ; 90.901,81.489 cw(c90.693,81.28) v4@90.988,81.28 ; 90.953,87.077 ccw(c90.953,87.374) U1.19@91.163,87.164 ; 90.953,87.077 cw(c90.953,86.781) U1.19@91.163,86.991 ; 90.953,87.077 ccw(c90.953,87.374) U1.19@91.163,87.164 ; 90.953,87.077 cw(c90.953,86.781) U1.19@91.163,86.991 ; 90.953,87.077 ccw(c90.953,87.374) U1.19@91.163,87.164 ; 90.953,87.077 cw(c90.953,86.781) U1.19@91.163,86.991 ; v4@91.038,79.1 cw(c90.743,78.805) 91.161,78.805 ; v4@91.038,79.1 cw(c90.743,78.805) 91.161,78.805 ; v4@91.038,79.1 cw(c90.743,78.805) 91.161,78.805 ; 91.161,78.805 cw(c91.578,78.805) v4@91.283,79.1 ; 91.161,78.805 cw(c91.578,78.805) v4@91.283,79.1 ; 91.161,78.805 cw(c91.578,78.805) v4@91.283,79.1
  Bottom Layer w0.254: v2@85.166,66.599 85.623,67.056 85.623,69.139 86.004,69.52 89.967,69.52 v2(90.17,69.723) ; v4(91.161,79.223) v4@91.161,81.305 ; v2@85.166,66.863 ccw(c85.166,67.499) 85.617,67.049 ; v2@85.166,66.863 ccw(c85.166,67.499) 85.617,67.049 ; v2@85.166,66.863 ccw(c85.166,67.499) 85.617,67.049 ; v2@85.379,66.65 cw(c85.771,66.65) 85.494,66.926 ; v2@85.379,66.65 cw(c85.771,66.65) 85.494,66.926 ; v2@85.379,66.65 cw(c85.771,66.65) 85.494,66.926 ; 89.165,69.52 ccw(c89.165,70.728) v2@90.019,69.874 ; 89.165,69.52 ccw(c89.165,70.728) v2@90.019,69.874 ; 89.165,69.52 ccw(c89.165,70.728) v2@90.019,69.874 ; 89.581,69.62 cw(c89.767,69.297) v2@90.024,69.568 ; 89.581,69.62 cw(c89.767,69.297) v2@90.024,69.568 ; 89.581,69.62 cw(c89.767,69.297) v2@90.024,69.568 ; 89.778,69.52 ccw(c89.778,70.115) v2@90.199,69.694 ; 89.778,69.52 ccw(c89.778,70.115) v2@90.199,69.694 ; 89.778,69.52 ccw(c89.778,70.115) v2@90.199,69.694 ; v4@91.038,79.345 ccw(c90.743,79.64) 91.161,79.64 ; v4@91.038,79.345 ccw(c90.743,79.64) 91.161,79.64 ; v4@91.038,79.345 ccw(c90.743,79.64) 91.161,79.64 ; v4@91.038,81.158 cw(c90.743,80.862) 91.161,80.862 ; v4@91.038,81.158 cw(c90.743,80.862) 91.161,80.862 ; v4@91.038,81.158 cw(c90.743,80.862) 91.161,80.862 ; 91.161,79.64 ccw(c91.578,79.64) v4@91.283,79.345 ; 91.161,79.64 ccw(c91.578,79.64) v4@91.283,79.345 ; 91.161,79.64 ccw(c91.578,79.64) v4@91.283,79.345 ; 91.161,80.862 cw(c91.578,80.862) v4@91.283,81.158 ; 91.161,80.862 cw(c91.578,80.862) v4@91.283,81.158 ; 91.161,80.862 cw(c91.578,80.862) v4@91.283,81.158
  other v2: 85.166,66.65
  other v4: 91.161,81.28
BH2: BH2.2 U1.23 | length 74.5
  Top Layer w0.254: v2(89.992,83.693) 90.177,83.878 90.983,83.878 ; U1.23@91.775,83.878 91.694,83.878 91.549,84.022 91.128,84.022 90.983,83.878 ; v2@89.963,83.722 cw(c90.339,83.347) 90.339,83.878 ; v2@89.963,83.722 cw(c90.339,83.347) 90.339,83.878 ; v2@89.963,83.722 cw(c90.339,83.347) 90.339,83.878 ; v2@90.143,83.542 cw(c90.952,82.733) 90.952,83.878 ; v2@90.143,83.542 cw(c90.952,82.733) 90.952,83.878 ; v2@90.143,83.542 cw(c90.952,82.733) 90.952,83.878 ; v2@90.147,83.839 ccw(c90.388,84.065) 90.553,83.779 ; v2@90.147,83.839 ccw(c90.388,84.065) 90.553,83.779 ; v2@90.147,83.839 ccw(c90.388,84.065) 90.553,83.779 ; 90.953,83.878 ccw(c90.953,84.174) U1.23@91.163,83.964 ; 90.953,83.878 cw(c90.953,83.581) U1.23@91.163,83.791 ; 90.953,83.878 ccw(c90.953,84.174) U1.23@91.163,83.964 ; 90.953,83.878 cw(c90.953,83.581) U1.23@91.163,83.791 ; 90.953,83.878 ccw(c90.953,84.174) U1.23@91.163,83.964 ; 90.953,83.878 cw(c90.953,83.581) U1.23@91.163,83.791 ; 90.983,83.878 ccw(c90.983,84.105) U1.23@91.157,83.957 ; 90.983,83.878 cw(c90.983,83.65) U1.23@91.157,83.798 ; 90.983,83.878 ccw(c90.983,84.105) U1.23@91.157,83.957 ; 90.983,83.878 cw(c90.983,83.65) U1.23@91.157,83.798 ; 90.983,83.878 ccw(c90.983,84.105) U1.23@91.157,83.957 ; 90.983,83.878 cw(c90.983,83.65) U1.23@91.157,83.798
  Bottom Layer w0.254: BH2.2@81.584,37.174 80.569,38.189 ; v2(89.992,83.693) 89.464,83.164 89.464,81.484 88.193,80.213 86.004,80.213 85.471,79.68 85.471,78.359 81.915,74.803 81.915,63.856 85.522,60.249 85.522,55.499 80.569,50.546 80.569,38.189 ; 80.569,38.189 ccw(c81.519,39.139) BH2.2@81.57,37.797 ; 80.569,38.189 ccw(c81.519,39.139) BH2.2@81.57,37.797 ; 80.569,38.189 ccw(c81.519,39.139) BH2.2@81.57,37.797 ; 80.98,37.778 ccw(c81.549,38.348) BH2.2@81.58,37.543 ; 80.98,37.778 ccw(c81.549,38.348) BH2.2@81.58,37.543 ; 80.98,37.778 ccw(c81.549,38.348) BH2.2@81.58,37.543 ; BH2.2@81.268,37.866 cw(c81.117,37.201) BH2.2@81.721,37.516 ; BH2.2@81.268,37.866 cw(c81.117,37.201) BH2.2@81.721,37.516 ; BH2.2@81.268,37.866 cw(c81.117,37.201) BH2.2@81.721,37.516 ; 89.629,83.329 ccw(c89.265,83.693) v2@89.779,83.693 ; 89.629,83.329 cw(c89.992,82.966) v2@89.992,83.48 ; 89.629,83.329 ccw(c89.265,83.693) v2@89.779,83.693 ; 89.629,83.329 cw(c89.992,82.966) v2@89.992,83.48 ; 89.629,83.329 ccw(c89.265,83.693) v2@89.779,83.693 ; 89.629,83.329 cw(c89.992,82.966) v2@89.992,83.48
BI-R: U1.28 U2.2 | length 41.6
  Top Layer w0.254: U1.28@95.4,81.853 95.504,81.749 v2(95.504,75.59) ; U1.28@95.313,81.241 cw(c94.852,80.78) 95.504,80.78 ; U1.28@95.313,81.241 cw(c94.852,80.78) 95.504,80.78 ; U1.28@95.313,81.241 cw(c94.852,80.78) 95.504,80.78 ; v2@95.353,75.741 ccw(c94.99,76.105) 95.504,76.105 ; v2@95.353,75.741 ccw(c94.99,76.105) 95.504,76.105 ; v2@95.353,75.741 ccw(c94.99,76.105) 95.504,76.105 ; 95.447,81.008 cw(c95.608,81.1) U1.28@95.483,81.237 ; 95.447,81.008 cw(c95.608,81.1) U1.28@95.483,81.237 ; 95.447,81.008 cw(c95.608,81.1) U1.28@95.483,81.237 ; 95.504,76.105 ccw(c96.018,76.105) v2@95.655,75.741 ; 95.504,76.105 ccw(c96.018,76.105) v2@95.655,75.741 ; 95.504,76.105 ccw(c96.018,76.105) v2@95.655,75.741
  Top Layer w0.6: U2.2@107.854,74.092 v2(109.372,74.092)
  Bottom Layer w0.254: v2(95.504,75.59) 95.834,75.921 106.832,75.921 108.661,74.092 v2(109.372,74.092) ; v2@95.475,75.619 cw(c96.202,74.892) 96.202,75.921 ; v2@95.475,75.619 cw(c96.202,74.892) 96.202,75.921 ; v2@95.475,75.619 cw(c96.202,74.892) 96.202,75.921 ; v2@95.486,75.554 ccw(c95.668,75.925) 95.875,75.567 ; v2@95.486,75.554 ccw(c95.668,75.925) 95.875,75.567 ; v2@95.486,75.554 ccw(c95.668,75.925) 95.875,75.567 ; v2@95.559,75.796 ccw(c95.657,76.162) 95.847,75.834 ; v2@95.559,75.796 ccw(c95.657,76.162) 95.847,75.834 ; v2@95.559,75.796 ccw(c95.657,76.162) 95.847,75.834 ; v2@95.598,75.782 ccw(c95.921,76.441) 96.288,75.805 ; v2@95.598,75.782 ccw(c95.921,76.441) 96.288,75.805 ; v2@95.598,75.782 ccw(c95.921,76.441) 96.288,75.805 ; v2@95.655,75.44 cw(c96.815,74.279) 96.815,75.921 ; v2@95.655,75.44 cw(c96.815,74.279) 96.815,75.921 ; v2@95.655,75.44 cw(c96.815,74.279) 96.815,75.921 ; v2@95.714,75.553 cw(c96.206,75.464) 95.956,75.897 ; v2@95.714,75.553 cw(c96.206,75.464) 95.956,75.897 ; v2@95.714,75.553 cw(c96.206,75.464) 95.956,75.897 ; 108.858,74.092 ccw(c108.858,74.606) v2@109.222,74.242 ; 108.858,74.092 cw(c108.858,73.578) v2@109.222,73.941 ; 108.858,74.092 ccw(c108.858,74.606) v2@109.222,74.242 ; 108.858,74.092 cw(c108.858,73.578) v2@109.222,73.941 ; 108.858,74.092 ccw(c108.858,74.606) v2@109.222,74.242 ; 108.858,74.092 cw(c108.858,73.578) v2@109.222,73.941